# Altium PCB Pet_Tracker_PCB.PcbDoc
Units mm, origin at the board's own origin, x right, y up, seen from the top; angles counter-clockwise.
Board outline 60 x 50 mm, 4 copper layers (Top Layer, Layer 1, Layer 2, Bottom Layer), stack 0.756 mm thick; 29 components, 65 nets, 241 pads, 112 vias.
Unrouted connection lines stored in the file: 7.
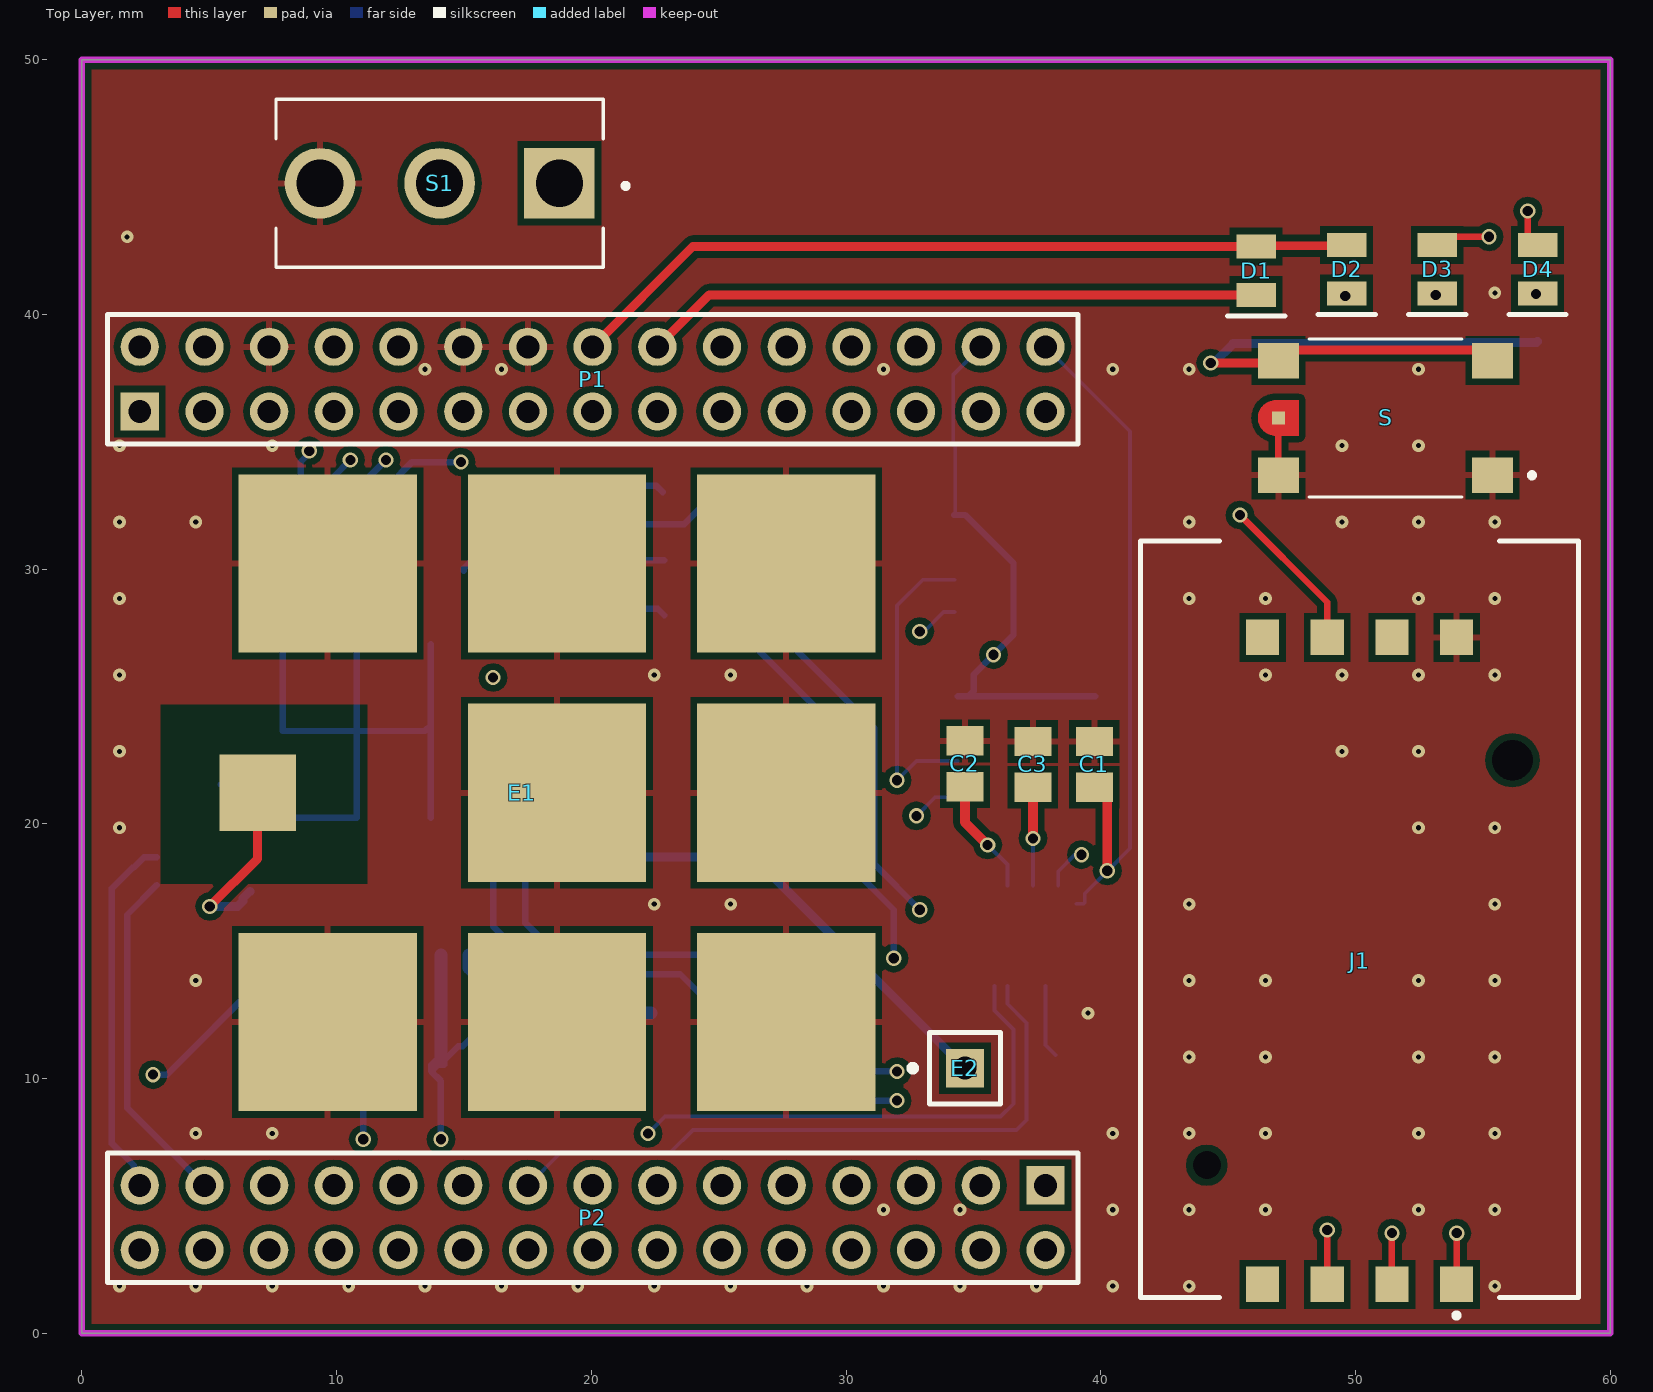
[diagram p0: Top Layer view]
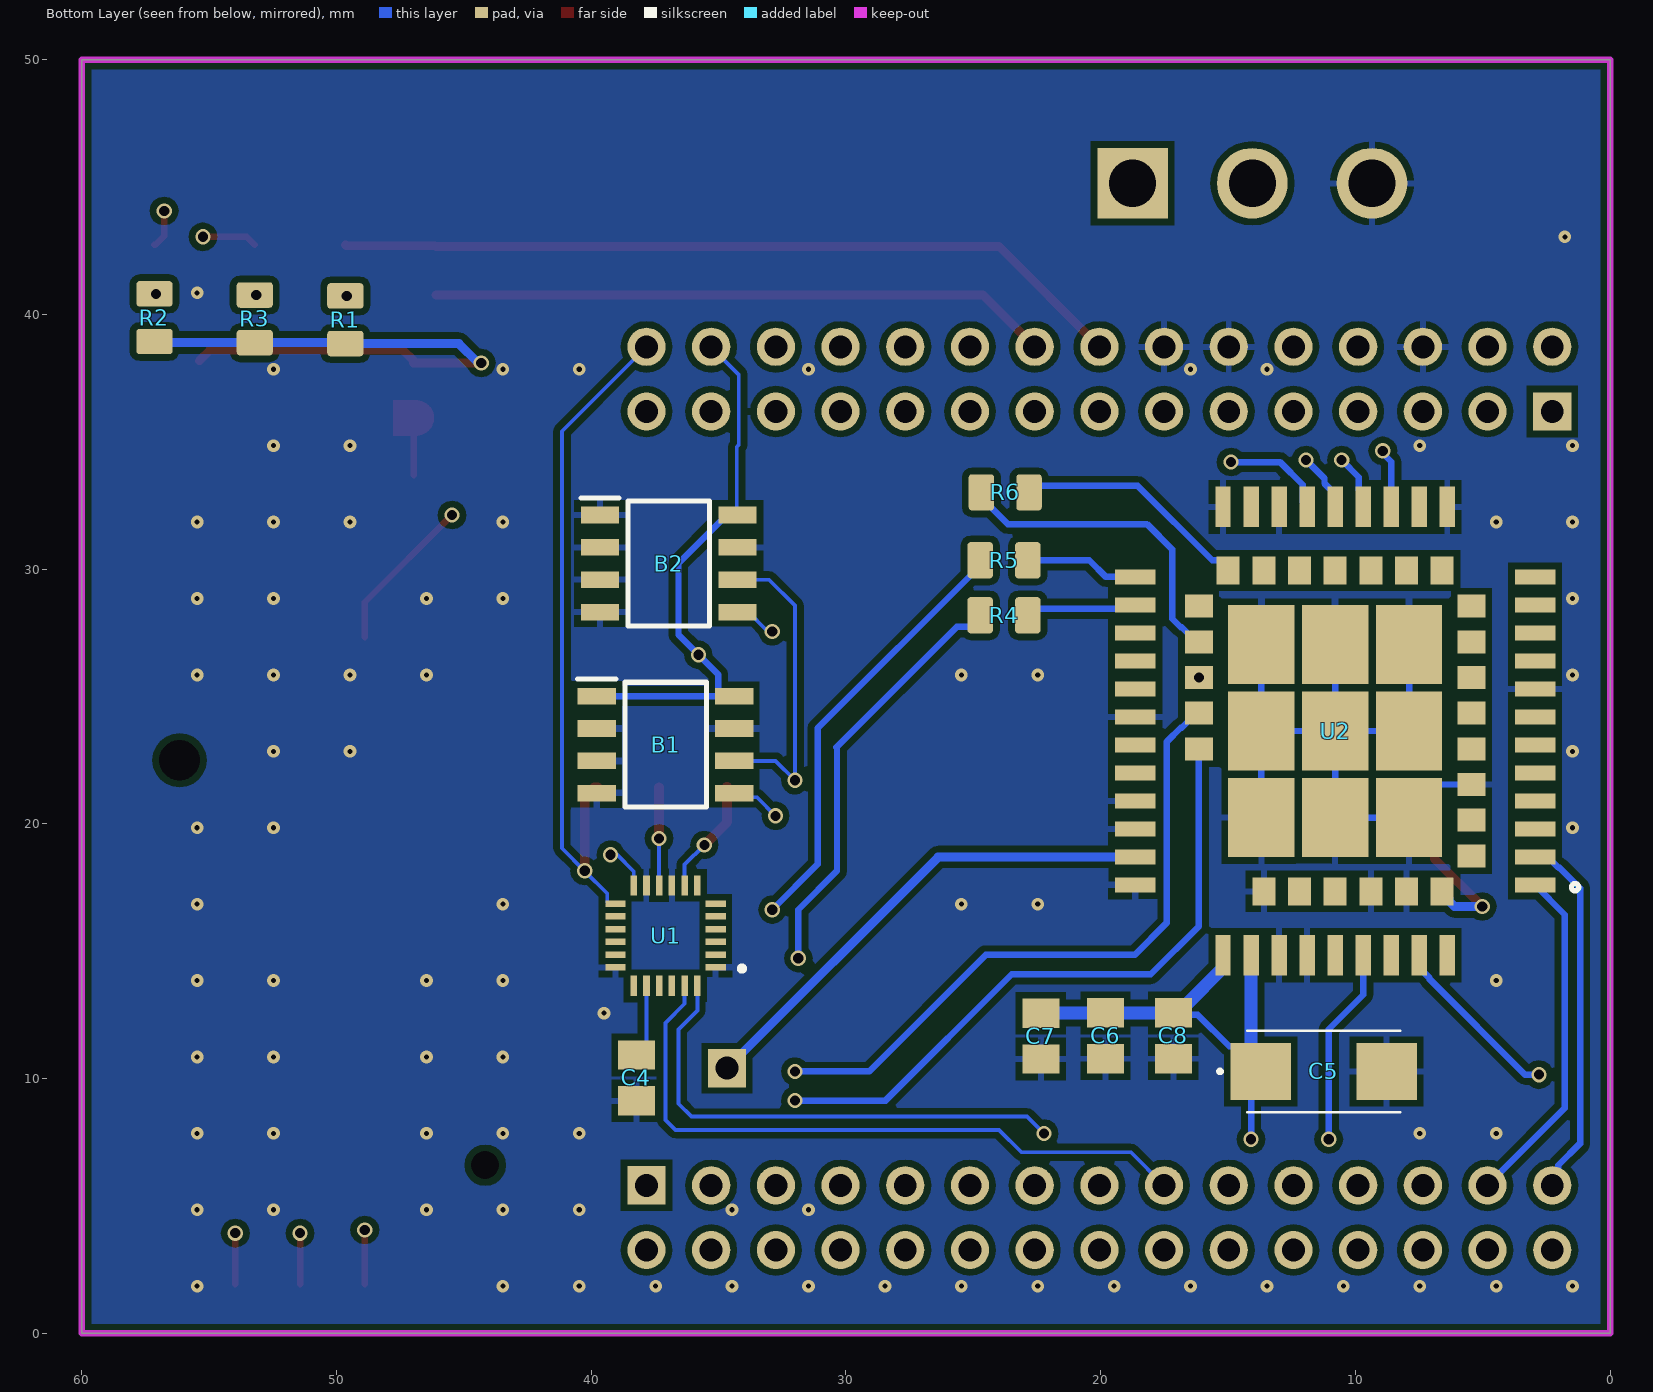
[diagram p1: Bottom Layer view, seen from below]
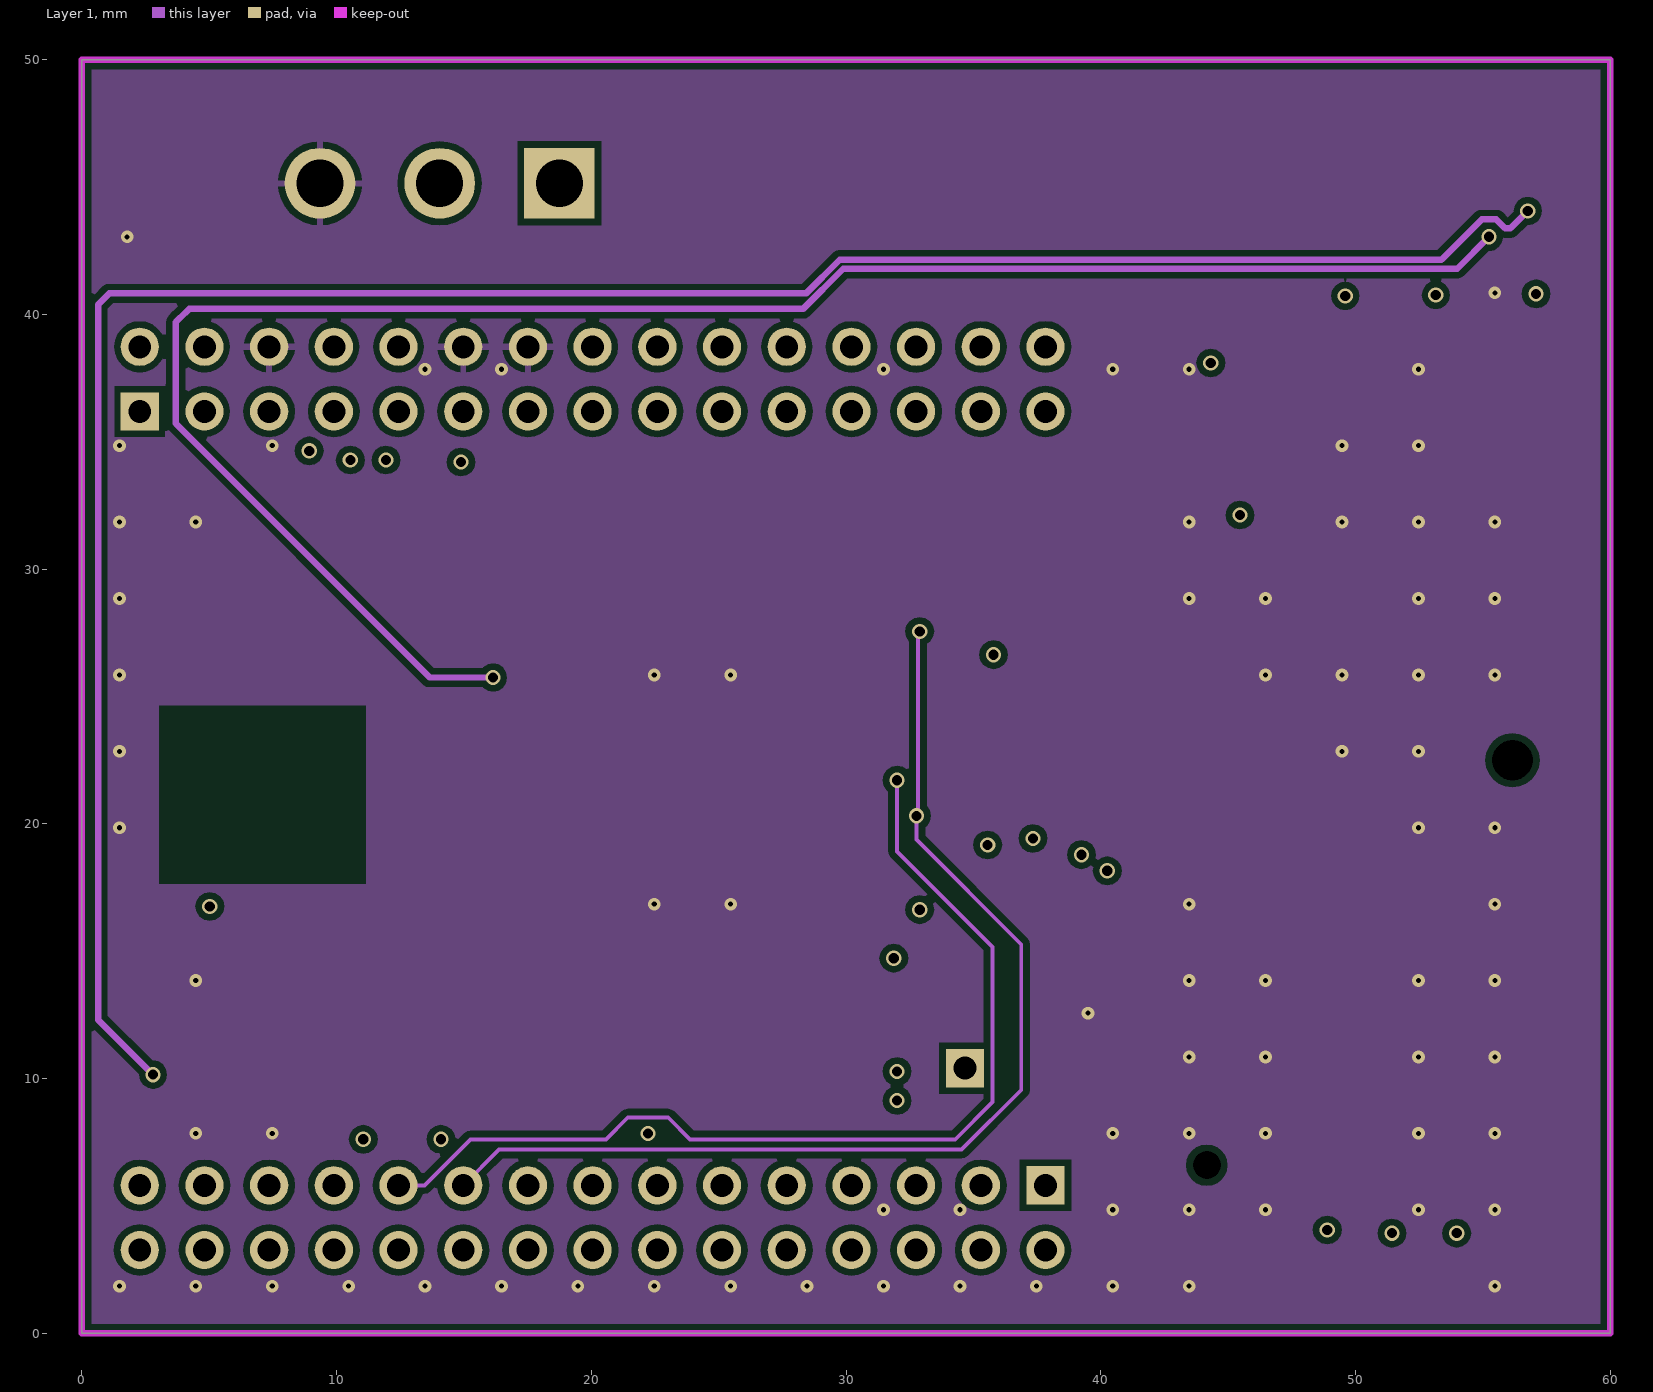
[diagram p2: Layer 1]
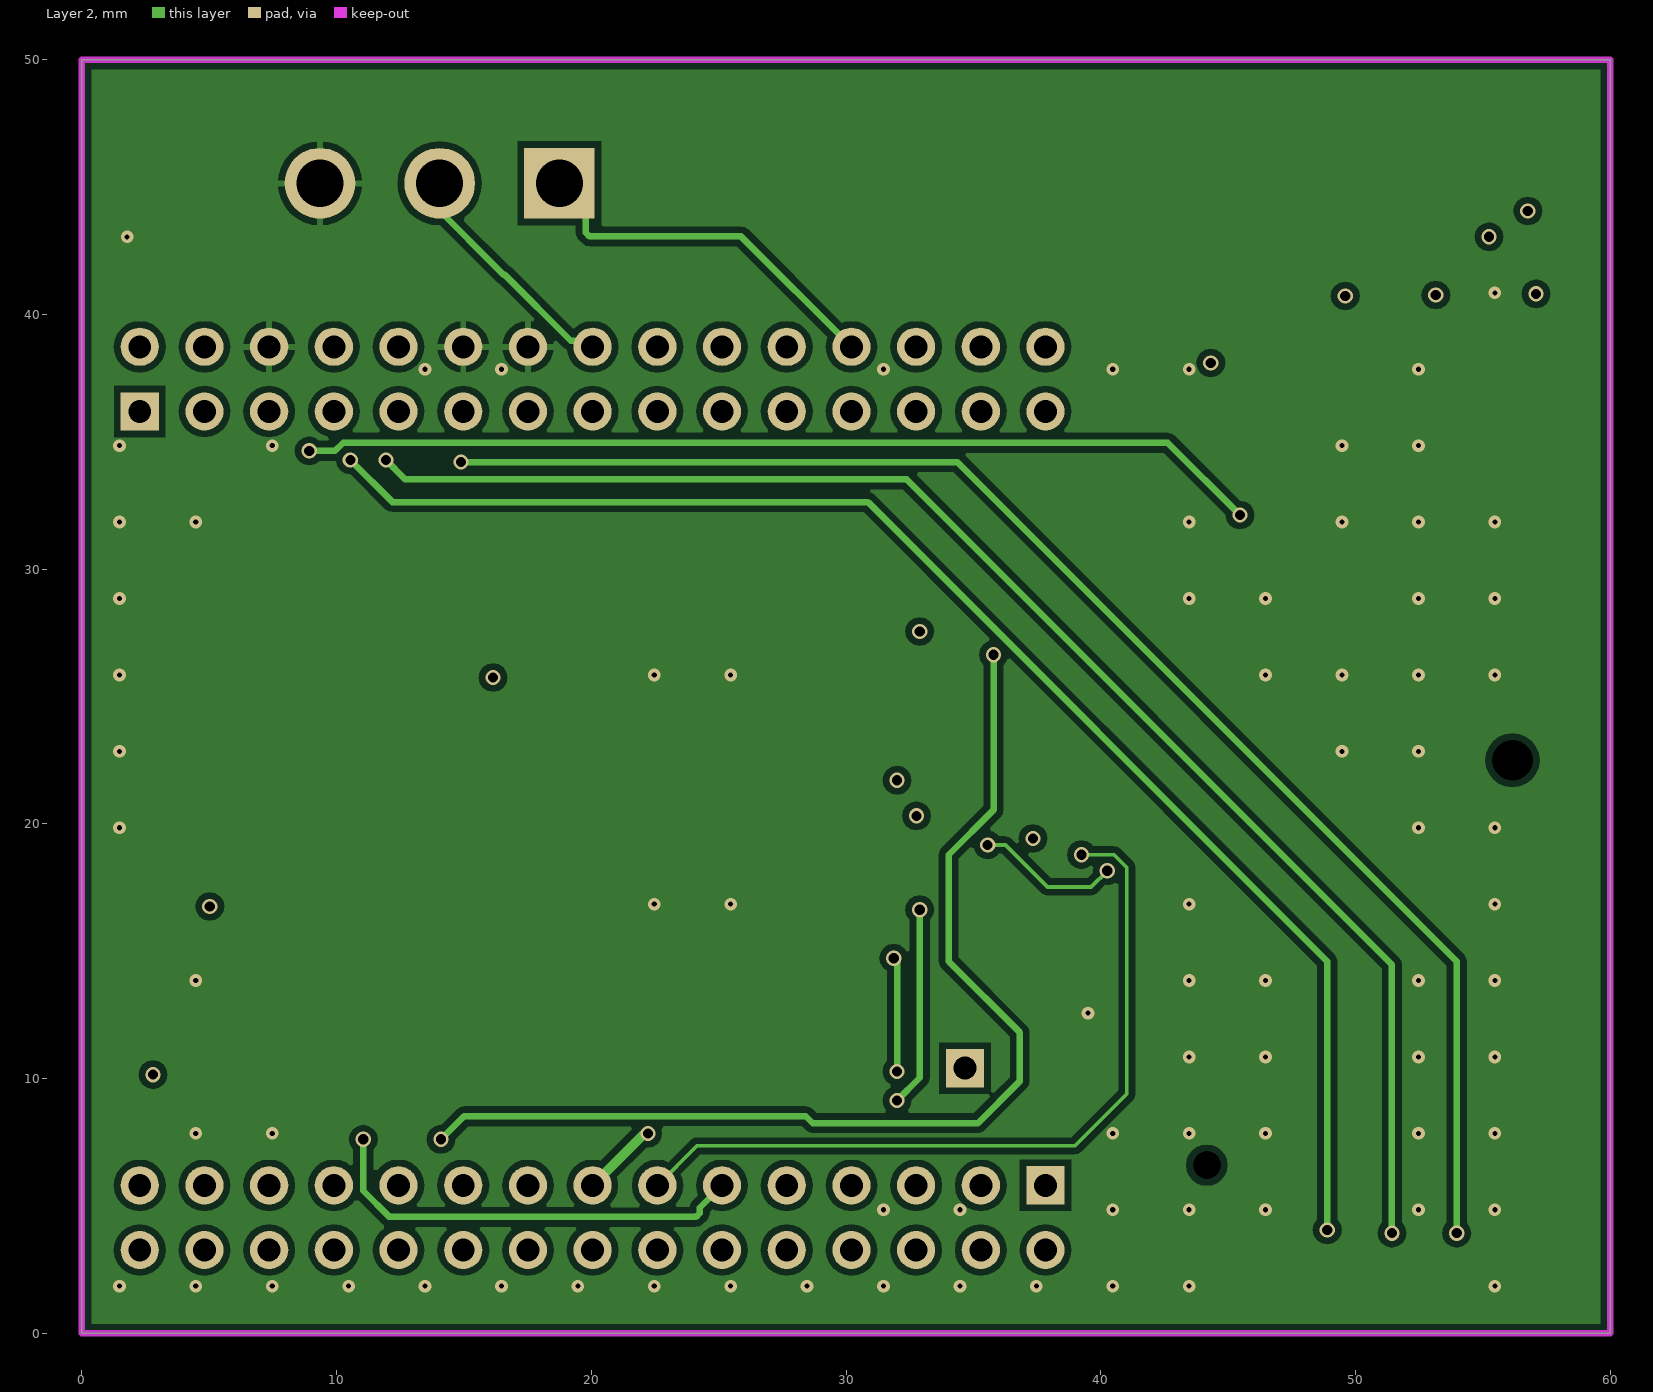
[diagram p3: Layer 2]
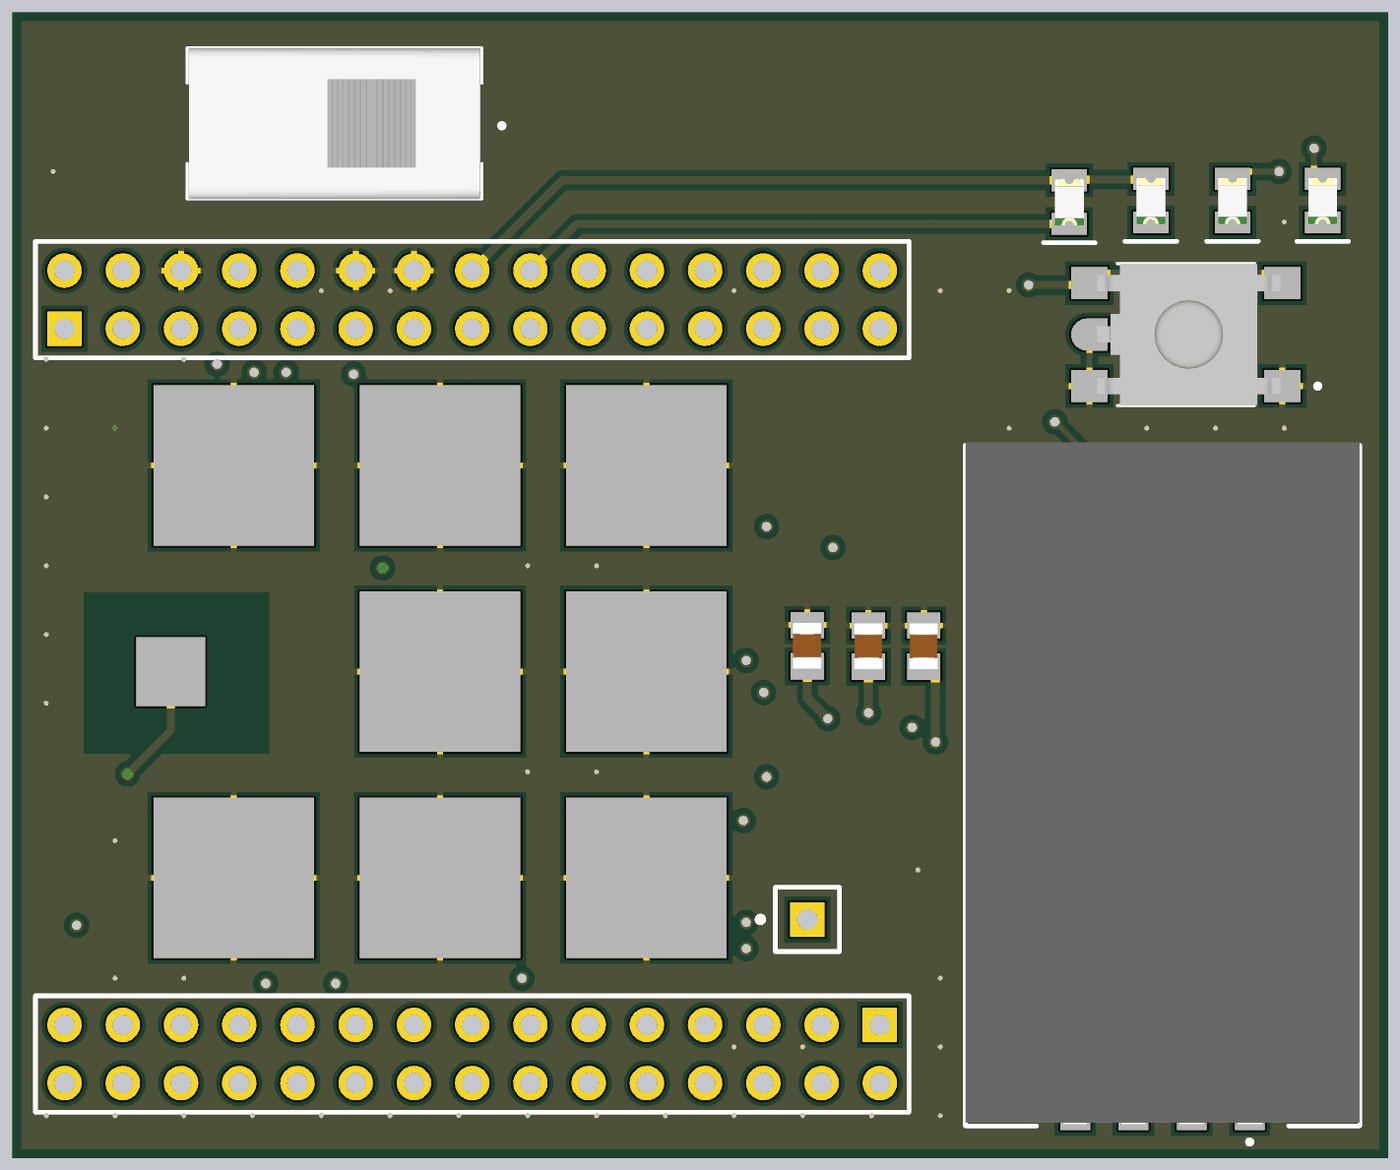
[diagram p4: 3D render of the assembled board from above, using the file's embedded part models]
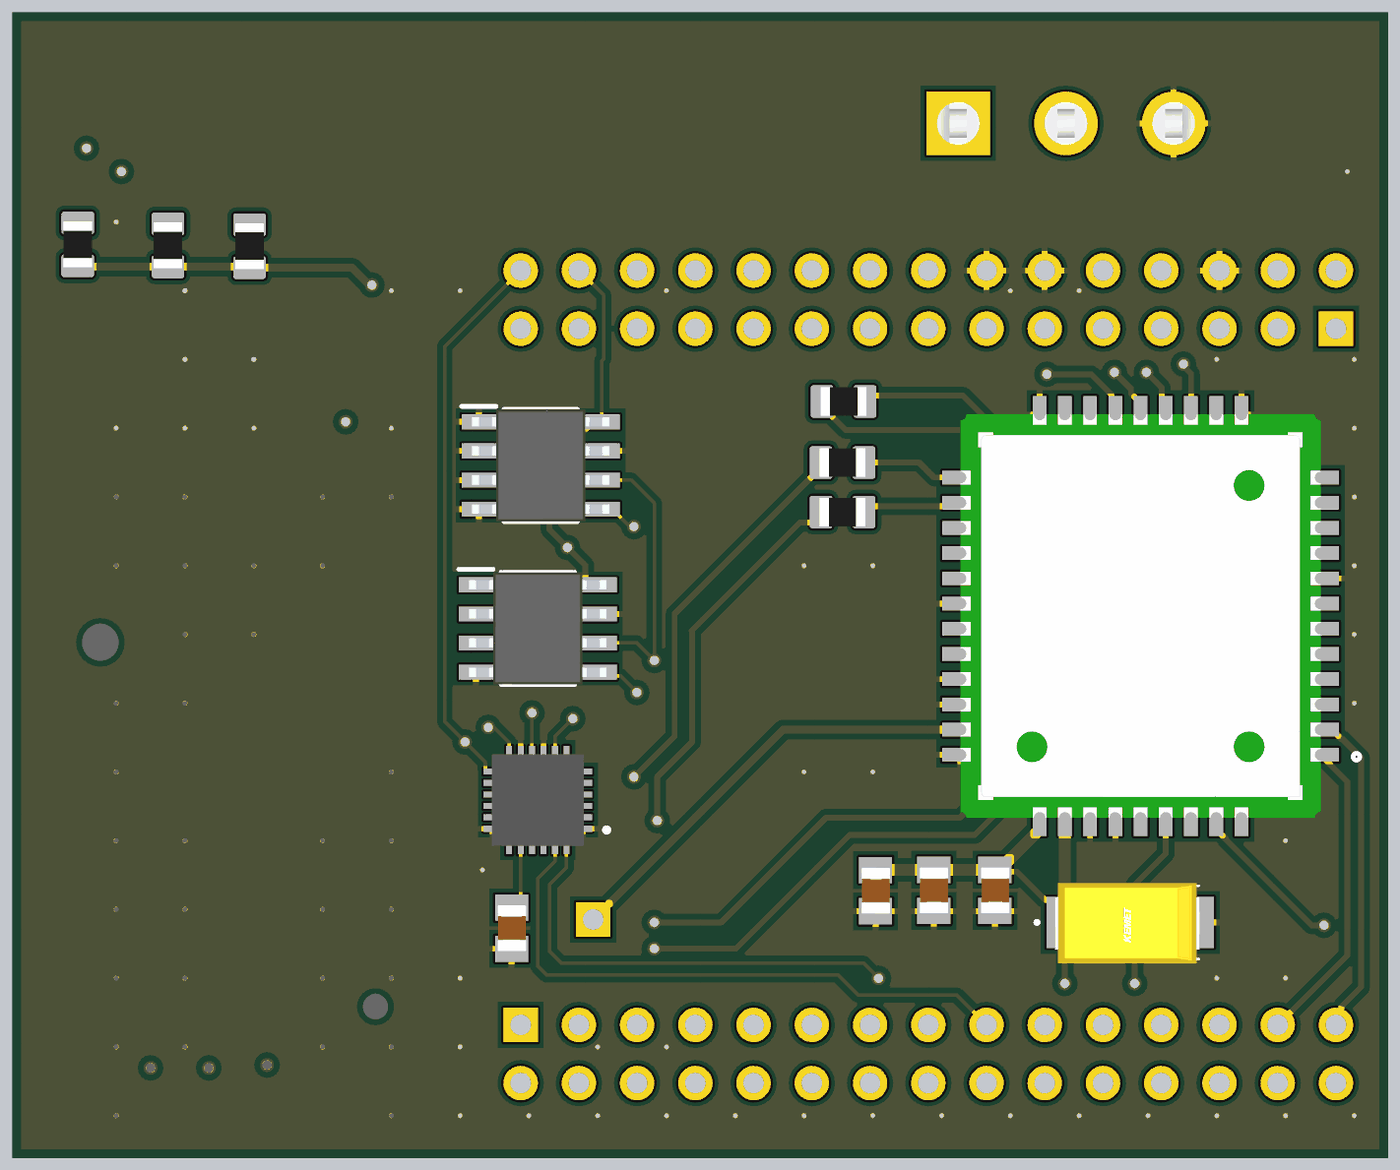
[diagram p5: 3D render of the assembled board from below, using the file's embedded part models]

## Layer stack, top to bottom
Top Solder: solder mask 0.0102, Solder Resist, Dk 3.5
Top Layer: signal copper 0.035
Dielectric 2: prepreg 0.203, PP-022, Dk 4.5
Layer 1: signal copper 0.0152
Dielectric 1: dielectric 0.25, FR-4, Dk 4.8
Layer 2: signal copper 0.0152
Dielectric 3: prepreg 0.203, PP-022, Dk 4.5
Bottom Layer: signal copper 0.035
Bottom Solder: solder mask 0.0102, Solder Resist, Dk 3.5

## Board outline
0,0 0,50 60,50 60,0

## Design rules (kind name [scope] priority, off if disabled: settings)
Clearance [All] p1: gap=0.254 ignorepadtopadclearanceinfootprint=FALSE except(0: Arc-Hole Track-Hole SMDPad-Hole THPad-Hole Via-Hole Fill-Hole Poly-Hole Region-Hole Text-Hole; 0.09: Arc-Arc Arc-Track Track-Track; 0.127: SMDPad-SMDPad)
ComponentClearance [All] p1: gap=0 collisioncheckmode=3 verticalgap=0 showdistances=FALSE donotcheckwithout3dbody=TRUE
Height [All] p1: minheight=0 maxheight=100 prefheight=12.7
MinimumSolderMaskSliver [All] p1: minsoldermaskwidth=0.008
PolygonConnect PolygonConnect_Via [IsVia] p1: thpad.connectstyle=Relief thpad.reliefconductorwidth=0.254 thpad.reliefentries=4 thpad.polygonreliefangle="90 Angle" thpad.airgapwidth=0.254 smdpad.connectstyle=Relief smdpad.reliefconductorwidth=0.254 smdpad.reliefentries=4 smdpad.polygonreliefangle="90 Angle" smdpad.airgapwidth=0.254 via.connectstyle=Direct via.reliefconductorwidth=0.254 via.reliefentries=4 via.polygonreliefangle="90 Angle" via.airgapwidth=0.254
PolygonConnect [All] p2: connectstyle=Relief reliefconductorwidth=0.254 reliefentries=4 polygonreliefangle="90 Angle" airgapwidth=0.254
RoutingVias [All] p1: holewidth=0.258 width=0.4 viastyle="Through Hole" minholewidth=0.15 minwidth=0.25 maxholewidth=1 maxwidth=1.2
SilkToSolderMaskClearance [IsPad] p1: minsilkscreentomaskgap=0.15 clearancetoexposedcopper=TRUE
SolderMaskExpansion [All] p1: expansion=0.102 istentingtop=FALSE
Width RF50 [InNetClass('RF')] p1: maxlimit=0.349 minlimit=0.158 preferedwidth=0.349 toplayer_minwidth=0.349 midlayer1_maxwidth=0.158 midlayer1_prefwidth=0.175 midlayer2_maxwidth=0.158 midlayer2_prefwidth=0.175 bottomlayer_minwidth=0.349 impedanceprofiledriven=TRUE impedanceprofileid={9640E81E-0014-46BB-B764-C6FE7C97A4BA} impedanceprofilevalue=50.000000 minimp=50.000000 maximp=50.000000 favimp=50.000000
Width [All] p2: maxlimit=1.5 minlimit=0.15 preferedwidth=0.254
26 further rules are at their usual default settings.

## Classes and differential pairs
net class RF: GNSS_ANT GSM_ANT
component class Schematic: B1 B2 C1 C2 C3 C4 D1 D2 D3 D4 P1 P2 R1 R2 R3 S S1 U1
component class Modem: C5 C6 C7 C8 E1 E2 J1 R4 R5 R6 U2

## Components (designator, comment, footprint, x,y, rotation, side; value= is the part's Value field where it differs from the comment)
B1 "8 Pin EEPROM" AT24C256 37.084,23.114 r180 bottom
B2 "8 Pin EEPROM" AT24C256 36.957,30.226 r180 bottom
C1 "10nF" CAP_0805 39.751,22.341 r270 top
C2 "100nF" CAP_0805 34.671,22.363 r270 top
C3 "100nF" CAP_0805 37.338,22.341 r270 top
C4 "2.2nF" CAP_0805 38.227,10.033 r90 bottom
C5 "100uF" TANTALUM_CAP_0805 11.246,10.287 r180 bottom
C6 "10uF" CAP_0805 19.812,11.684 r90 bottom
C7 "33pF" CAP_0805 22.352,11.673 r90 bottom
C8 "10pF" CAP_0805 17.145,11.684 r90 bottom
D1 "Charge_LED" LED_0805 46.101,41.722 r90 top
D2 "Power on LED" LED_0805 49.657,41.783 r90 top
D3 "GPS" LED_0805 53.213,41.783 r90 top
D4 "\" LED_0805 57.15,41.783 r90 top
E1 "GNSS_ANTENNA_SMD" GNSS_ANTENNA_SMD 18.652,21.226 r270 top
E2 "Antenna" PIN1 34.671,10.414 r90 top
J1 "SIMMP-00601B201-G" SIM_CARD 50.165,16.256 r0 top
P1 "Header 15X2" HDR2X15 2.273,36.195 r0 top
P2 "Header 15X2" HDR2X15 37.833,5.814 r180 top
R1 "130" RES_0805 49.657,39.797 r90 bottom
R2 "130" RES_0805 57.15,39.878 r90 bottom
R3 "130" RES_0805 53.213,39.832 r90 bottom
R4 "0" RES_0805 23.795,28.194 r180 bottom
R5 "0" RES_0805 23.795,30.353 r180 bottom
R6 "10k" RES_0805 23.749,33.02 r0 bottom
S "Tactile_Switch" TACTILE_SWITCH 51.181,35.941 r180 top
S1 "SLIDE_SWITCH_BIG" SLIDE_SWITCH_BIG 14.048,45.154 r180 top
U1 "MPU-6050" MPU_6050 37.084,15.621 r0 bottom
U2 "GPRS,GSM,GNSS Modem" SIM868 10.795,23.651 r0 bottom

## Footprints (in the part's own frame and the unit in brackets; to place one, negate y for a bottom-side part, rotate by r counter-clockwise, add the part's x,y. Pads: shape width x height; smd on the part's side, far side on the other; paste and mask are expansions set on the pad)
AT24C256 [mm]
  rect 1.5x0.65 smd: 1(-2.7,1.905) 2(-2.7,0.635) 3(-2.7,-0.635) 4(-2.7,-1.905) 5(2.7,-1.905) 6(2.7,-0.635) 7(2.7,0.635) 8(2.7,1.905)
  silkscreen extent -3.45,-2.45 1.6,2.58, body extent -3,-2.45 3,2.45, height 1.75
CAP_0805 [mm]
  rect 1.15x1.45 smd: 1(-0.9,0) 2(0.9,0)
  body extent -1,-0.64 1,0.62, height 0.94
GNSS_ANTENNA_SMD [mm]
  rect 3x3 smd: 1(0,-11.75)
  rect 7x7 smd: 2(-9,9) 2(-9,0) 2(-9,-9) 2(0,9) 2(0,0) 2(9,9) 2(9,0) 2(9,-9)
HDR2X15 [mm] "Connector; Header; 15x2 Position"
  rect 1.5x1.5 hole 0.9: 1(0,0)
  round 1.5 hole 0.9: 2(0,2.54) 3(2.54,0) 4(2.54,2.54) 5(5.08,0) 6(5.08,2.54) 7(7.62,0) 8(7.62,2.54) 9(10.16,0) 10(10.16,2.54) 11(12.7,0) 12(12.7,2.54) 13(15.24,0) 14(15.24,2.54) 15(17.78,0) 16(17.78,2.54) 17(20.32,0) 18(20.32,2.54) 19(22.86,0) 20(22.86,2.54) 21(25.4,0) 22(25.4,2.54) 23(27.94,0) 24(27.94,2.54) 25(30.48,0) 26(30.48,2.54) 27(33.02,0) 28(33.02,2.54) 29(35.56,0) 30(35.56,2.54)
  silkscreen extent -1.27,-1.27 36.83,3.81
LED_0805 [mm]
  rect 0.95x1.55 smd: 1(-0.95,0) 2(0.95,0)
  silkscreen extent -1.78,-1.12 -1.78,1.12, body extent -1.02,-0.63 0.98,0.63, height 0.7
MPU_6050 [mm]
  rect 0.79x0.26 smd: 1(-1.97,1.25) 2(-1.97,0.75) 3(-1.97,0.25) 4(-1.97,-0.25) 5(-1.97,-0.75) 6(-1.97,-1.25) 13(1.97,-1.25) 14(1.97,-0.75) 15(1.97,-0.25) 16(1.97,0.25) 17(1.97,0.75) 18(1.97,1.25)
  rect 0.26x0.79 smd: 7(-1.25,-1.97) 8(-0.75,-1.97) 9(-0.25,-1.97) 10(0.25,-1.97) 11(0.75,-1.97) 12(1.25,-1.97) 19(1.25,1.97) 20(0.75,1.97) 21(0.25,1.97) 22(-0.25,1.97) 23(-0.75,1.97) 24(-1.25,1.97)
  silkscreen extent -3.1,1.2 -2.9,1.4, body extent -2,-2 2,2, height 0.93
PIN1 [mm] "Generic Antenna; 1 Lead"
  rect 1.5x1.5 hole 0.9: 1(0,0)
  silkscreen extent -1.4,-1.4 1.4,2.17
RES_0805 [mm]
  rrect25% 1x1.42 smd: 1(-0.935,0) 2(0.935,0)
  body extent -1,-0.63 1,0.63, height 0.6
SIM868 [mm]
  rect 1.6x0.6 smd: 1(-7.85,6.05) 2(-7.85,4.95) 3(-7.85,3.85) 4(-7.85,2.75) 5(-7.85,1.65) 6(-7.85,0.55) 7(-7.85,-0.55) 8(-7.85,-1.65) 9(-7.85,-2.75) 10(-7.85,-3.85) 11(-7.85,-4.95) 12(-7.85,-6.05) 22(7.85,-6.05) 23(7.85,-4.95) 24(7.85,-3.85) 25(7.85,-2.75) 26(7.85,-1.65) 27(7.85,-0.55) 28(7.85,0.55) 29(7.85,1.65) 30(7.85,2.75) 31(7.85,3.85) 32(7.85,4.95) 33(7.85,6.05)
  rect 0.6x1.6 smd: 13(-4.4,-8.8) 14(-3.3,-8.8) 15(-2.2,-8.8) 16(-1.1,-8.8) 17(0,-8.8) 18(1.1,-8.8) 19(2.2,-8.8) 20(3.3,-8.8) 21(4.4,-8.8) 34(4.4,8.8) 35(3.3,8.8) 36(2.2,8.8) 37(1.1,8.8) 38(0,8.8) 39(-1.1,8.8) 40(-2.2,8.8) 41(-3.3,8.8) 42(-4.4,8.8)
  rect 1.1x0.9 smd: 43(-5.35,4.9) 44(-5.35,3.5) 45(-5.35,2.1) 46(-5.35,0.7) 47(-5.35,-0.7) 48(-5.35,-2.1) 49(-5.35,-3.5) 50(-5.35,-4.9) 58(5.35,-4.9) 59(5.35,-3.5) 60(5.35,-2.1) 61(5.35,-0.7) 62(5.35,0.7)
  rect 0.9x1.1 smd: 51(-4.2,-6.3) 52(-2.8,-6.3) 53(-1.4,-6.3) 54(0,-6.3) 55(1.4,-6.3) 56(2.8,-6.3) 57(4.2,-6.3) 63(2.8,6.3) 64(1.4,6.3) 65(0,6.3) 66(-1.4,6.3) 67(-2.8,6.3) 68(-4.2,6.3)
  rect 2.6x3.1 smd: 69(-2.9,3.4) 70(-2.9,0) 71(-2.9,-3.4) 72(0,-3.4) 73(2.9,-3.4) 74(2.9,0) 75(2.9,3.4) 76(0,3.4) 77(0,0)
  silkscreen extent -9.56,5.99 -9.27,6.28, body extent -7.85,-8.8 7.85,8.8, height 2.3
SIM_CARD [mm]
  rect 1.3x1.4 smd: C1(3.81,-14.33) C2(1.27,-14.33) C3(-1.27,-14.33) C4(-3.81,-14.33) C5(3.81,11.07) C6(1.27,11.07) C7(-1.27,11.07) C8(-3.81,11.07)
  round 0.8 hole 1.6 unplated: MH1(6,6.25)
  round 0.55 hole 1.1 unplated: MH2(-6,-9.65)
  silkscreen extent -8.6,-15.65 8.6,14.85, body extent -8.6,-14.77 8.6,14.98, height 2.4
SLIDE_SWITCH_BIG [mm]
  rect 2.775x2.775 hole 1.85: 1(-4.7,0)
  round 2.775 hole 1.85: 2(0,0) 3(4.7,0)
  silkscreen extent -7.4,-3.3 6.43,3.3, body extent -6.35,-3.3 6.35,3.3, height 15.24
TACTILE_SWITCH [mm]
  rect 1.6x1.395 smd: 1(-4.205,2.248) 2(4.205,2.248) 3(-4.205,-2.248) 4(4.205,-2.248)
  rect 0.5x0.5 smd paste-1 mask+0: 5(4.205,0)
  Top Layer region: 4.378,0.696 4.451,0.685 4.521,0.666 4.59,0.639 4.655,0.606 4.716,0.566 4.773,0.52 4.825,0.468 4.871,0.411 4.911,0.35 4.944,0.285 4.971,0.216 4.99,0.146 5.001,0.073 5.005,0 5.001,-0.073 4.99,-0.146 4.971,-0.216 4.944,-0.285 4.911,-0.35 4.871,-0.411 4.825,-0.468 4.773,-0.52 4.716,-0.566 4.655,-0.606 4.59,-0.639 4.521,-0.666 4.451,-0.685 4.378,-0.696 4.305,-0.7 3.405,-0.7 3.405,0.7 4.305,0.7
  silkscreen extent -5.85,-3.1 3,3.1, body extent -4.13,-3.1 3.87,3.1, height 3.05
TANTALUM_CAP_0805 [mm]
  rect 2.37x2.23 smd: 1(-2.47,0) 2(2.47,0)
  silkscreen extent -4.12,-1.6 3,1.6, body extent -3.28,-1.78 3.02,1.72, height 2.81

## Part data
B1 B2: library part AT24C256C, "EEPROM 256K (32K X 8), 2-WI 1.8V /  / https://lt.farnell.com/microchip/at24c256c-sshl-t/serial-eeprom-256kbit-1mhz-soic/dp/2345588?st=AT24C256", Arrow Part Number=AT24C256C-SSHL-T, Manufacturer_Name=Microchip, Mouser Part Number=556-AT24C256C-SSHL-T, Arrow Price/Stock=https://www.arrow.com/en/products/at24c256c-sshl-t/microchip-technology?region=nac, Datasheet Link=http://www.atmel.com/Images/Atmel-8568-SEEPROM-AT24C256C-Datasheet.pdf, Geometry.Height=1.75mm, Manufacturer_Part_Number=AT24C256C-SSHL-T, Mouser Price/Stock=https://www.mouser.co.uk/ProductDetail/Microchip-Technology/AT24C256C-SSHL-T?qs=fzsaQExJLyR3ptk4tHE3tA%3D%3D
C1 C2 C3 C4 C6 C7 C8: library part SMT_CAP, Package=None, Availability=Unavailable, MP=LD051A270KAB2A, Price=None
C5: library part SMT_TANTALUM_CAP, "T491C107K016AT", Manufacturer_Name=KEMET, Mouser Part Number=80-T491C107K016AT, Arrow Part Number=T491C107K016AT, Arrow Price/Stock=https://www.arrow.com/en/products/t491c107k016at/kemet-corporation?region=nac, Datasheet Link=https://content.kemet.com/datasheets/KEM_T2005_T491.pdf, Geometry.Height=2.8mm, Manufacturer_Part_Number=T491C107K016AT, Mouser Price/Stock=https://www.mouser.co.uk/ProductDetail/KEMET/T491C107K016AT?qs=Si2vDv5E4YMke5HCn79NYA%3D%3D
D1 D2 D3 D4: library part LED, "PART: MULTICOMP PRO MP008291LED /  / https://lt.farnell.com/multicomp-pro/mp008291/led-green-70mcd-576nm-0805/dp/3796323?st=smt%20led", Manufacturer_Name="Avago Technologies", Manufacturer_Part_Number=HSMH-C170, Mouser Part Number=630-HSMH-C170, Datasheet Link=https://docs.broadcom.com/docs/AV02-0551EN, Geometry.Height=0.9mm, Mouser Price/Stock=https://www.mouser.co.uk/ProductDetail/Broadcom-Avago/HSMH-C170?qs=YDL0qNrpDT6b21G9HrN9ig%3D%3D
E1: "Ceramic GNSS antenna 25*25 SMD", Package=None, Availability="In Stock", Check_prices=https://www.snapeda.com/parts/ANT-GNSSCP-TH18L1/Linx/view-part/?ref=eda, MF=Linx, MP=ANT-GNSSCP-TH18L1, Price=None, Purchase-URL=https://pricing.snapeda.com/search/part/ANT-GNSSCP-TH18L1/?ref=eda, SnapEDA_Link=https://www.snapeda.com/parts/ANT-GNSSCP-TH18L1/Linx/view-part/?ref=snap
E2: "Generic Antenna", LatestRevisionDate=17-Jul-2002, LatestRevisionNote="Re-released for DXP Platform.", PackageReference=PIN1, Published=24-Mar-1999, Publisher="Altium Limited"
J1: library part "SIM Card Connector", "CONNECTOR, MINI SIM, 6PIN, COVER /  / https://lt.farnell.com/multicomp/simmp-00601b201-g/connector-mini-sim-6pin-cover/dp/2211807?st=sim+card+", Manufacturer_Name="Multicomp Pro", Datasheet Link=http://www.farnell.com/datasheets/3180618.pdf, Geometry.Height=2.3mm, Manufacturer_Part_Number=SIMMP-00601B201-G
P1 P2: "Header, 15-Pin, Dual row", LatestRevisionDate=17-Jul-2002, LatestRevisionNote="Re-released for DXP Platform.", Publisher="Altium Limited"
R1 R2 R3 R4 R5 R6: library part SMT_RES, Package=0805, Power_Rating=".25 W", Resistance=.33, Tolerance=1%, Availability="In Stock", Check_prices=https://www.snapeda.com/parts/2-2176053-0/TE+Connectivity/view-part/?ref=eda, EU_RoHS_Compliance="Compliant with Exemptions", MF="TE Connectivity", MP=2-2176053-0, Price=None, SnapEDA_Link=https://www.snapeda.com/parts/2-2176053-0/TE+Connectivity/view-part/?ref=snap
S: "Part Nr:FSM1LPTR /  / https://lt.farnell.com/alcoswitch-te-connectivity/fsm1lptr/tactile-switch-spst-no-0-05a-24v/dp/2610937", Package="SMD-6 Omron Electronics", Availability=Unavailable, MF="TE Connectivity", MP=1-1437565-9, Price=None, SnapEDA_Link=https://www.snapeda.com/parts/1-1437565-9/TE%20Connectivity/view-part/294310/?ref=snap
S1: "Part NR: 500SSP1S2M2QEA /  / Link: https://lt.farnell.com/e-switch/500ssp1s2m2qea/slide-switch-spdt-5a-28vdc-tht/dp/4050989?st=spdt", Package=None, Availability=Unavailable, MP=500SSP1S2M2QEA, Price=None
U1: "MPU-6050 series Accelerometer, Gyroscope, 3 Axis Sensor Evaluation Board /  / https://lt.farnell.com/invensense/mpu-6050/gyro-accel-6-axis-i2c-qfn-24/dp/1864742", Package="QFN-24 InvenSense", Availability="In Stock", Check_prices=https://www.snapeda.com/parts/MPU-6050/TDK+InvenSense/view-part/?ref=eda, MF="TDK InvenSense", MP=MPU-6050, Price=None, Purchase-URL=https://pricing.snapeda.com/search/part/MPU-6050/?ref=eda, SnapEDA_Link=https://www.snapeda.com/parts/MPU-6050/TDK+InvenSense/view-part/?ref=snap
U2: library part SIM868, Manufacturer_Name=SIMCOM, DeviceSetName=SIM868, GateName_1=G$1, Height=mm, LibraryName=SIM868, Manufacturer_Part_Number=SIM868, Package=SIM868, SymbolName_1=SIM868

## Via types
v1: diameter 0.5, hole 0.2, Top Layer to Bottom Layer, tented both sides, 80 vias
v2: diameter 0.6, hole 0.4, Top Layer to Bottom Layer, tented both sides, 29 vias
v3: diameter 0.6, hole 0.4, Top Layer to Bottom Layer, 3 vias

## Nets (pads, with @x,y where several pads share a name; then routed paths per layer and width w, separated by ;. In a path a pad name is that pad's centre, name@x,y a point inside that pad or via, vN(x,y) a via of type N, cw(c..) or ccw(c..) an arc to the next point about the centre after c; other vN are vias at no path point)
3V3: C1.2 C2.2 P1.30 U1.8 U1.13 | length 38
  Top Layer w0.381: C2.2 34.671,20.066 v2(35.56,19.177) ; C1.2 39.874,21.441 40.259,21.056 v2(40.259,18.161)
  Layer 2 w0.152: v2(35.56,19.177) 36.256,19.177 37.907,17.526 39.624,17.526 v2(40.259,18.161)
  Bottom Layer w0.152: v2(35.56,19.177) 36.334,18.403 U1.8 ; P1.30 41.148,35.42 41.148,19.05 v2(40.259,18.161) 39.373,17.275 39.373,16.925 39.319,16.871 U1.13
4V: B1.1 B1.8 B2.8 C5.1 C6.2 C7.2 C8.2 P1.28 U2.34 U2.35 | length 85.4
  Layer 2 w0.254: v2(14.097,7.62) 15.004,8.527 28.425,8.527 28.697,8.255 35.179,8.255 36.83,9.906 36.83,11.811 34.036,14.605 34.036,18.796 35.792,20.552 v2(35.792,26.648)
  Bottom Layer w0.152: B2.8 34.29,32.164 34.29,34.796 34.213,34.874 34.213,37.655 P1.28
  Bottom Layer w0.254: C5.1@14.095,10.666 C5.1 ; v2(14.097,7.62) 14.097,9.906 C5.1 ; C5.1@14.272,10.793 14.095,10.793 13.968,10.793 13.716,10.541 C5.1 ; C8.2@17.15,12.579 17.077,12.505 16.188,12.505 14.958,11.275 14.774,11.275 14.222,10.723 14.222,10.539 13.968,10.539 C5.1 ; B2.8 34.682,32.131 36.576,30.237 36.576,27.432 v2(35.792,26.648) 35.007,25.863 35.007,25.217 B1.8@34.809,25.019 ; B1.8 B1.8@34.809,25.019 ; B1.1 B1.8@34.809,25.019
  Bottom Layer w0.508: C5.1@14.095,10.666 U2.35 ; U2.34 15.195,14.351 16.641,12.905 16.824,12.905 C8.2 17.15,12.579 19.812,12.579 22.346,12.579 C7.2
5V: P1.26
5V_UNREGULATED: P1.24 S1.1 | length 14.7
  Layer 2 w0.254: S1.1 19.785,44.117 19.785,43.217 19.934,43.068 25.88,43.068 P1.24
5V_USB_CHRG: P1.22
ACC_INT: P2.13 U1.12 | length 32.6
  Layer 2 w0.152: P2.13 24.145,7.366 38.989,7.366 41.021,9.398 41.021,18.29 40.52,18.791 v2@39.2,18.791
  Bottom Layer w0.152: U1.12 38.334,18.141 38.989,18.796 v2(39.243,18.796)
CH_LED_CA: D1.1 P1.18 | length 24.4
  Top Layer w0.349: P1.18 24.63,40.772 D1.1
GND: B1.2 B1.3 B1.4 B1.7 B2.1 B2.2 B2.3 B2.4 B2.7 C1.1 C2.1 C3.1 C4.1 C5.2 C6.1 C7.1 C8.1 E1.2 J1.C5 P1.6 P1.12 P1.14 S1.3 S.1 S.2 S.5 U1.1 U1.9 U1.11 U1.18 U2.8 U2.13 U2.19 U2.21 U2.27 U2.30 U2.31 U2.33 U2.36 U2.37 U2.45 U2.63 U2.66 U2.67 U2.69 U2.70 U2.71 U2.72 U2.73 U2.74 U2.75 U2.76 U2.77 | length 31.1
  Top Layer w0.254: S.2 S.5
  Bottom Layer w0.254: U2.45 6.722,21.551 7.895,20.378 U2.69 U2.76 U2.77 ; U2.71 U2.70 U2.77 ; U2.72 U2.77 ; U2.75 U2.74@13.695,23.876 ; U2.73 U2.74@13.695,23.876 ; U2.77 13.47,23.651 U2.74@13.695,23.876
  other v1: 1.473,1.854 4.473,1.854 7.473,1.854 10.473,1.854 13.473,1.854 16.473,1.854 19.473,1.854 22.473,1.854 25.473,1.854 28.473,1.854 31.473,1.854 34.473,1.854 37.473,1.854 40.473,1.854 43.473,1.854 55.473,1.854 31.473,4.854 34.473,4.854 40.473,4.854 43.473,4.854 46.473,4.854 52.473,4.854 55.473,4.854 4.473,7.854 7.473,7.854 40.473,7.854 43.473,7.854 46.473,7.854 52.473,7.854 55.473,7.854 43.473,10.854 46.473,10.854 52.473,10.854 55.473,10.854 39.497,12.573 4.473,13.854 43.473,13.854 46.473,13.854 52.473,13.854 55.473,13.854 22.473,16.854 25.473,16.854 43.473,16.854 55.473,16.854 1.473,19.854 52.473,19.854 55.473,19.854 1.473,22.854 49.473,22.854 52.473,22.854 1.473,25.854 22.473,25.854 25.473,25.854 46.473,25.854 49.473,25.854 52.473,25.854 55.473,25.854 1.473,28.854 43.473,28.854 46.473,28.854 52.473,28.854 55.473,28.854 1.473,31.854 4.473,31.854 43.473,31.854 49.473,31.854 52.473,31.854 55.473,31.854 1.473,34.854 7.473,34.854 49.473,34.854 52.473,34.854 13.473,37.854 16.473,37.854 31.473,37.854 40.473,37.854 43.473,37.854 52.473,37.854 55.473,40.854 1.778,43.053
GNSS_ANT: E1.1 U2.68 | length 7.1
  Top Layer w0.349: v2(5.023,16.764) 6.902,18.643 E1.1
  Bottom Layer w0.349: v2(5.023,16.764) 6.115,16.764 6.32,16.968 6.32,17.075 U2.68
GNSS_STATUS: D3.2 U2.60 | length 75.7
  Top Layer w0.254: D3.2 53.533,43.053 v2(55.245,43.053)
  Layer 1 w0.254: v2(16.145,25.751) 13.657,25.751 3.682,35.727 3.682,39.705 3.831,39.854 3.843,39.854 4.212,40.223 28.313,40.223 29.894,41.804 53.996,41.804 v2(55.245,43.053)
GPS_RX: R5.1 U2.62 | length 50.6
  Layer 2 w0.254: v2(32.004,9.144) 32.893,10.033 v2(32.893,16.637)
  Bottom Layer w0.254: U2.62 16.145,15.986 18.034,14.097 23.495,14.097 28.448,9.144 v2(32.004,9.144) ; R5.1 24.73,30.143 31.115,23.758 31.115,18.415 v2(32.893,16.637)
GPS_TX: R4.1 U2.61 | length 47.1
  Layer 2 w0.254: v2(31.877,14.732) 32.004,14.605 v2(32.004,10.287)
  Bottom Layer w0.254: U2.61 16.245,24.351 16.814,23.782 16.853,23.782 17.399,23.236 17.399,16.129 18.669,14.859 24.511,14.859 29.083,10.287 v2(32.004,10.287) ; R4.1 24.73,28.109 25.103,27.736 25.648,27.736 30.375,23.009 30.353,22.987 30.353,18.161 31.877,16.637 v2(31.877,14.732)
GSM_ANT: E2.1 U2.32 | length 19.5
  Bottom Layer w0.349: U2.32 26.384,18.701 E2.1
GSM_PW: P2.11 U2.39 | length 25
  Layer 2 w0.254: v2(11.049,7.62) 11.049,5.599 12.076,4.572 24.108,4.572 24.257,4.721 24.257,4.938 P2.11
  Bottom Layer w0.254: U2.39 9.695,13.292 11.049,11.938 v2(11.049,7.62)
GSM_STATUS: D4.2 U2.41 | length 97.5
  Top Layer w0.254: v2(56.769,44.069) 56.769,43.081 57.117,42.733 D4.2
  Layer 1 w0.254: v2(2.794,10.16) 0.635,12.319 0.635,40.386 1.078,40.829 28.433,40.829 29.752,42.148 53.377,42.148 54.963,43.734 55.527,43.734 55.875,43.386 56.086,43.386 v2(56.769,44.069)
  Bottom Layer w0.254: v2(2.794,10.16) 3.343,10.16 7.076,13.893 7.076,13.932 7.495,14.351 U2.41
I2C1SCL: B1.6 B2.6 P2.21 | length 51.8
  Layer 1 w0.152: P2.21 13.445,5.814 15.251,7.62 20.574,7.62 21.43,8.476 23.02,8.476 23.876,7.62 34.29,7.62 35.751,9.081 35.751,15.176 32.004,18.923 v2(32.004,21.717)
  Bottom Layer w0.152: B2.6 33.02,29.591 32.004,28.575 v2(32.004,21.717) 32.766,22.479 B1.6
I2C1SDA: B1.5 B2.5 P2.19 | length 46.9
  Layer 1 w0.152: P2.19 16.375,7.216 34.536,7.216 36.881,9.561 36.881,15.275 32.766,19.39 v2(32.766,20.32) 32.829,20.383 32.829,27.495 v2(32.893,27.559)
  Bottom Layer w0.152: v2(32.766,20.32) 33.495,21.049 34.224,21.049 B1.5 ; v2(32.893,27.559) 32.979,27.645 33.156,27.645 33.832,28.321 B2.5
I2C2SCL: P2.17 U1.23 | length 26.2
  Bottom Layer w0.152: P2.17 18.811,7.112 23.114,7.112 23.991,7.989 36.691,7.989 37.084,8.382 37.084,12.192 36.334,12.942 U1.23
I2C2SDA: P2.15 U1.24 | length 22.8
  Layer 2 w0.381: P2.15 22.043,7.804 22.183,7.804 v2(22.225,7.846)
  Bottom Layer w0.152: v2(22.225,7.846) 22.888,8.509 36.068,8.509 36.576,9.017 36.576,11.938 35.834,12.68 U1.24
NetC3_2: C3.2 U1.10 | length 3.9
  Top Layer w0.381: v2(37.338,19.431) C3.2
  Bottom Layer w0.152: U1.10 37.336,17.593 37.336,19.429 v2(37.338,19.431)
NetC4_2: C4.2 U1.20 | length 2.9
  Bottom Layer w0.152: U1.20 37.834,11.326 C4.2
NetD2_1: D2.1 R1.2
  other v3: 49.6,40.732
NetD3_1: D3.1 R3.2
  other v3: 53.156,40.767
NetD4_1: D4.1 R2.2
  other v3: 57.093,40.813
NetR1_1: R1.1 R2.1 R3.1 S.3 S.4 | length 24.6
  Top Layer w0.349: v2(44.323,38.1) S.4@46.976,38.1 ; S.4 47.395,38.608 54.967,38.608 S.3
  Bottom Layer w0.349: v2(44.323,38.1) 44.437,38.1 45.199,38.862 R1.1 49.698,38.903 57.109,38.903 R2.1
NetR6_1: R6.1 U2.57 | length 9.3
  Bottom Layer w0.254: U2.57 14.995,30.031 15.318,30.354 15.622,30.354 18.542,33.274 22.56,33.274 R6.1
NetR6_2: R6.2 U2.59 | length 12.7
  Bottom Layer w0.254: U2.59 16.245,27.151 16.814,27.72 16.853,27.72 17.189,28.056 17.189,30.778 18.187,31.776 23.65,31.776 24.684,32.81 R6.2
NRESET: P1.10
PA5: P2.9
PA6: P2.7
PA7: P2.5
PA8: P2.3
PA11: P2.1
PA12: P1.29
PB0: P1.27
PB1: P1.25
PB2: P1.23
PB12: P1.21
PB13: P1.19
PB14: P1.17
PB15: P1.15
PC4: P1.13
PC6: P1.11
PC7: P1.9
PC8: P1.7
PC9: P1.5
PC10: P1.3
PC11: P1.1
POWER_ON: D1.2 D2.2 P1.16 S1.2 | length 39.9
  Top Layer w0.349: P1.16 23.99,42.672 D1.2 46.132,42.703 49.626,42.703 D2.2
  Layer 2 w0.254: S1.2@13.733,44.389 16.567,41.555 16.611,41.555 19.196,38.97 19.818,38.97 P1.16
SIM_CLOCK: J1.C3 U2.16 | length 61.4
  Top Layer w0.254: J1.C3 v2(48.895,4.064)
  Layer 2 w0.254: v2(10.541,34.29) 12.192,32.639 30.861,32.639 48.895,14.605 v2(48.895,4.064)
  Bottom Layer w0.254: U2.16 9.695,32.951 9.868,33.124 9.868,33.617 v2(10.541,34.29)
SIM_DATA: J1.C7 U2.15 | length 46.4
  Top Layer w0.254: v2(45.466,32.131) 48.895,28.702 J1.C7
  Layer 2 w0.254: v2(8.925,34.65) 9.938,34.65 10.259,34.971 42.626,34.971 v2(45.466,32.131)
  Bottom Layer w0.254: U2.15 8.595,34.226 8.925,34.556 v2(8.925,34.65)
SIM_RES1: J1.C4
SIM_RES2: J1.C8
SIM_RESET: J1.C2 U2.17 | length 62.6
  Top Layer w0.254: J1.C2 v2(51.435,3.937)
  Layer 2 w0.254: v2(11.938,34.29) 12.7,33.528 32.385,33.528 51.435,14.478 v2(51.435,3.937)
  Bottom Layer w0.254: U2.17 10.795,32.951 11.214,33.37 11.214,33.566 v2(11.938,34.29)
SIM_VCC: J1.C1 U2.18 | length 64
  Top Layer w0.254: J1.C1 v2(53.975,3.937)
  Layer 2 w0.254: v2(14.881,34.209) 34.371,34.209 53.975,14.605 v2(53.975,3.937)
  Bottom Layer w0.254: U2.18 12.068,32.624 12.068,33.316 12.961,34.209 v2(14.881,34.209)
SIM_VPP: J1.C6
SWCLK: P1.4
SWDIO: P1.8
UART1RX: P2.27 U2.1 | length 13.5
  Bottom Layer w0.254: U2.1 1.778,16.434 1.778,8.849 P2.27
UART1TX: P2.29 U2.2 | length 14.4
  Bottom Layer w0.254: P2.29 2.035,6.052 2.035,6.601 1.181,7.455 1.181,17.475 1.987,18.282 2.026,18.282 2.445,18.701 U2.2
UART2_RX: R4.2 U2.23 | length 4.4
  Bottom Layer w0.254: U2.23 18.798,28.448 22.606,28.448 R4.2
UART2_TX: R5.2 U2.22 | length 4.5
  Bottom Layer w0.254: U2.22 19.795,29.701 20.447,30.353 R5.2
UART2RX: P2.23
UART2TX: P2.25
V_Bat: P1.20
pads on no net: J1.MH1 J1.MH2 P1.2 P2.2 P2.4 P2.6 P2.8 P2.10 P2.12 P2.14 P2.16 P2.18 P2.20 P2.22 P2.24 P2.26 P2.28 P2.30 U1.2 U1.3 U1.4 U1.5 U1.6 U1.7 U1.14 U1.15 U1.16 U1.17 U1.19 U1.21 U1.22 U2.3 U2.4 U2.5 U2.6 U2.7 U2.9 U2.10 U2.11 U2.12 U2.14 U2.20 U2.24 U2.25 U2.26 U2.28 U2.29 U2.38 U2.40 U2.42 U2.43 U2.44 U2.46 U2.47 U2.48 U2.49 U2.50 U2.51 U2.52 U2.53 U2.54 U2.55 U2.56 U2.58 U2.64 U2.65

## Polygon pours and split planes (outlines as drawn)
GND on Layer 1 "GND_L02_P001" (solid, remove dead copper, pour order 1): 0,0 0,50 60,50 60,0
GND on Layer 2 "GND_L03_P002" (solid, remove dead copper, pour order 2): 0,0 0,50 60,50 60,0
GND on Bottom Layer "GND_L04_P003" (solid, remove dead copper, pour order 3): 0,0 0,50 60,50 60,0
GND on Top Layer "GND_L01_P000" (solid, remove dead copper, pour order 0): 0,0 0,50 60,50 60,0

## Keep-outs
Keep-Out Layer:
  the board outline again, w0.254

## Other copper
Top Layer:
  pour cut-out: 3.098,24.638 11.198,24.638 11.198,17.653 3.098,17.653
  pour cut-out: 3.098,24.688 11.198,24.688 11.198,17.703 3.098,17.703
Layer 1:
  pour cut-out: 3.048,24.638 11.148,24.638 11.148,17.653 3.048,17.653

## Dimensions
39.103,2.004 to 60,0 on Mechanical 1
1.003,2.004 to 0,0 on Mechanical 1
1.003,40.005 to 0,50 on Mechanical 1
39.103,40.005 to 60,50 on Mechanical 1